# Altium PCB ESP32 with USB C V1.PcbDoc (part 3 of 3)
Units mil, origin at the board's own origin, x right, y up, seen from the top; angles counter-clockwise.
Board outline 2700 x 1000 mil, 4 copper layers (L1, L2, L3, L4), stack 61.583 mil thick; 64 components, 74 nets, 299 pads, 161 vias.
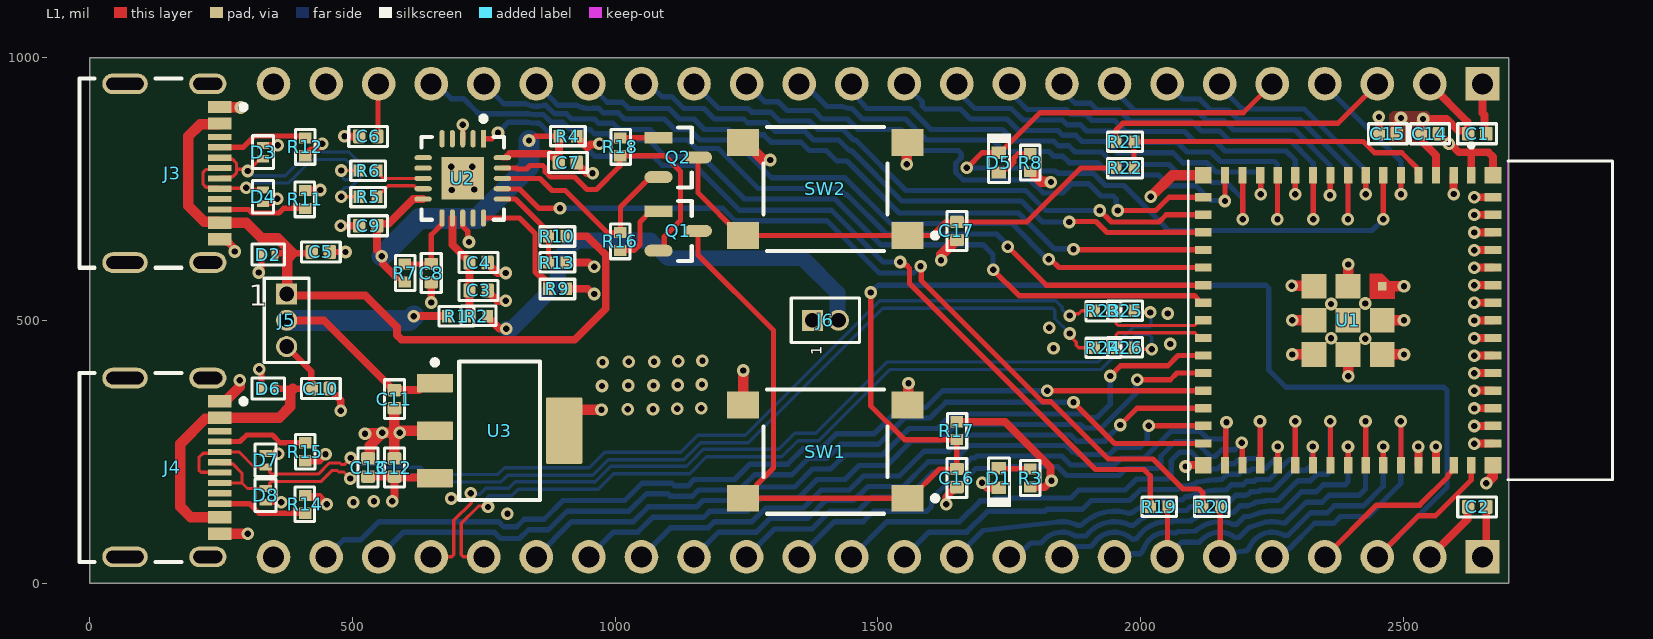
[diagram p0: L1 view]

## Via types
v1: diameter 24, hole 12, L1 to L4, 161 vias

## Nets (pads, with @x,y where several pads share a name; then routed paths per layer and width w, separated by ;. In a path a pad name is that pad's centre, name@x,y a point inside that pad or via, vN(x,y) a via of type N, cw(c..) or ccw(c..) an arc to the next point about the centre after c; other vN are vias at no path point) (continued)
CHIP_PU: (continued)
  L1 w10: Q1.3 1157.42,624.58 1301,481 1301,218.91 1269.02,186.93 1269.02,182.01 SW1.2@1248.43,161.42 ; SW1.2 SW1.2@1248.43,161.42 ; v1(1486,553) 1486,337.42 1550.43,272.99 R17.1 C16.2 1617.2,217.2 1561.42,161.42 SW1.1 SW1.2@1248.43,161.42 ; J2.3 2528.34,128.34 2560.66,128.34 2628.66,196.34 U1.45
  L4 w10: v1(1486,553) 1499.82,566.82 2237.67,566.82 2243.53,560.96 2243.53,405.47 2276.37,372.63 2576.57,372.63 2582.43,366.77 2582.43,182.43 J2.3
CON1_USB_N: D3.2 J3.A7 J3.B7 R5.1 | length 517
  L1 w6.03: J3.A7 250.53,772.97 272.14,772.97 279.29,780.12 279.29,789.76 ; J3.B7 250.53,806.56 272.14,806.56 279.29,799.4 279.29,789.76 ; D3.2 325.08,807.2 301.87,784 v1(301,784) 297.56,787.44 281.62,787.44 279.29,789.76 ; v1(479,735) R5.1
  L4 w6.03: v1(301,784) 304.53,784 313.52,775.01 372.28,775.01 417.34,820.08 493.53,820.08 514.08,799.53 514.08,770.47 496.59,752.99 485.78,752.99 482.25,749.45 482.25,738.25 v1(479,735)
CON1_USB_P: D4.2 J3.A6 J3.B6 R6.1 | length 497.7
  L1 w6.03: J3.A6 244.75,786.87 221.3,786.87 215.99,781.56 215.99,758.6 221.3,753.28 244.75,753.28 J3.B6 248.44,751.2 297.2,751.2 v1(298,752) 300.1,749.9 327.9,749.9 D4.2 ; v1(479,785) R6.1
  L4 w6.03: v1(298,752) 301.53,752 310.52,760.99 378.09,760.99 423.15,806.05 487.72,806.05 500.05,793.72 500.05,776.28 490.78,767.01 485.78,767.01 482.25,770.55 482.25,781.75 v1(479,785)
CON2_USB_N: D7.2 J4.A7 J4.B7 R23.1 | length 1978.5
  L1 w6.03: J4.A7 246.87,211 212,211 208,215 208,239 215.95,246.95 244.99,246.95 J4.B7 284.37,249.61 312.97,221 D7.2 338.84,221 342.71,217.13 342.71,211.05 346.25,207.51 434.87,207.51 455.87,228.51 476.39,228.51 479.39,225.51 484.72,225.51 497,237.8 v1(497,238)
  L1 w6.23: v1(1865,509) 1868.4,512.4 1881.59,512.4 1887.19,518 R23.1
  L4 w6.03: v1(497,238) 497,237.8 509.28,225.51 557.48,225.51 562.48,220.51 630.69,220.51 644.47,206.74 776.7,206.74 777,207.03
  L4 w6.23: 777,207.03 789.42,219.46 951,219.46 980.51,248.97 1124.76,248.97 1156.91,281.12 1247.3,281.12 1503.32,537.15 1838.35,537.15 1850.74,524.76 1850.74,519.76 1861.5,509 v1(1865,509)
CON2_USB_P: D8.2 J4.A6 J4.B6 R24.1 | length 1958.7
  L1 w6.03: J4.B6 290.01,190.55 ; J4.A6 250.53,227.03 272.14,227.03 290.01,209.15 290.01,190.55 ; v1(496,199) 496,199.2 483.72,211.49 473.58,211.49 470.58,214.49 461.68,214.49 440.68,193.49 346.25,193.49 342.71,189.95 342.71,183.87 338.84,180 D8.2 300.56,180 290.01,190.55
  L1 w6.23: v1(1865,475) 1865,470.19 1877.09,458.1 1877.09,452.5 1881.59,448 R24.1
  L4 w6.03: v1(496,199) 496,199.2 508.28,211.49 551.67,211.49 556.67,206.49 624.88,206.49 638.66,192.7 782.51,192.7 786.78,196.97 787.06,196.97
  L4 w6.23: 787.06,196.97 795.32,205.23 956.89,205.23 986.41,234.74 1130.65,234.74 1162.8,266.89 1253.19,266.89 1509.22,522.92 1832.46,522.92 1836.51,518.87 1836.51,503.49 v1(1865,475)
CON_ESP_USB_N: J2.21 R25.1 | length 1660.7
  L1 w6.23: J2.21 689.24,50 692.89,53.65 692.89,119.45 726.74,153.3 726.74,169.26 v1(725,171) ; R25.1@1987.01,515 v1(2018,515)
  L4 w6.23: v1(725,171) 726.74,169.26 742.7,169.26 754.01,180.58 797.58,180.58 810,193 962,193 991.51,222.51 1135.72,222.51 1167.87,254.66 1311.27,254.66 1341.95,285.34 1381.69,285.34 1517.19,420.85 1919.05,420.85 1985.32,487.11 2015.85,487.11 2019.5,490.76 2019.5,513.5 v1(2018,515)
CON_ESP_USB_P: J2.20 R26.1 | length 1641.4
  L1 w6.23: J2.20 710.76,50 707.11,53.65 707.11,113.55 740.3,146.74 756.26,146.74 v1(758,145) ; R26.1 1990.01,445 v1(2021,445)
  L4 w6.23: v1(758,145) 756.26,146.74 756.26,162.7 759.91,166.34 803.47,166.34 815.89,178.77 967.89,178.77 997.41,208.28 1141.61,208.28 1173.76,240.43 1317.16,240.43 1347.85,271.11 1387.58,271.11 1523.09,406.62 1924.94,406.62 1991.21,472.89 2015.85,472.89 2021,467.74 v1(2021,445)
CON_GPIO0: J1.3 R21.1 | length 556.4
  L1 w10: R21.1 1952,840.99 1952,861.14 1965.86,875 2375,875 J1.3
DTR_FTDI: Q2.2 R16.1 U2.18 | length 412
  L1 w10: U2.18 857.1,770 880.1,747 905,747 984.99,667.01 R16.1 1010,715.47 1067.12,772.6 Q2.2
ESP_USB_N: R23.2 R25.2 U1.23 | length 199.2
  L1 w6.03: R23.2 1952.99,511.02 1952.99,493.82 1956.52,490.28 2102.55,490.28 2106.09,493.82 2106.09,495.14 2110.94,500 U1.23
ESP_USB_P: R26.2 U1.24 | length 196.8
  L1 w6.03: R26.2 1952.99,472.72 1956.52,476.25 2102.55,476.25 2106.09,472.72 2106.09,471.39 2110.94,466.54 U1.24
FTDI_USB_N: R5.2 U2.9 | length 99.3
  L1 w6.03: R5.2 547.01,736.18 554.62,743.8 555.8,743.8 567.98,755.97 598,755.97 617.54,755.97 623.19,750.32 U2.9
FTDI_USB_P: R6.2 U2.8 | length 96
  L1 w6.03: R6.2 554.62,777.39 554.62,773.53 558.16,770 598,770 U2.8
GND: C1.1 C2.1 C3.1 C4.1 C5.1 C6.1 C7.1 C8.1 C9.1 C10.1 C11.1 C12.1 C13.1 C14.1 C15.1 C16.1 C17.1 D1.1 D2.1 D3.1 D4.1 D6.1 D7.1 D8.1 J1.1 J1.23 J2.2 J2.24 J3.A1B12 J3.B1A12 J3.S1 J3.S2 J3.S3 J3.S4 J4.A1B12 J4.B1A12 J4.S1 J4.S2 J4.S3 J4.S4 R9.2 R11.1 R12.1 R13.1 R14.1 R15.1 SW1.3 SW1.4 SW2.3 SW2.4 U1.1 U1.2 U1.42 U1.43 U1.46 U1.47 U1.48 U1.49 U1.50 U1.51 U1.52 U1.53 U1.54 U1.55 U1.56 U1.57 U1.58 U1.59 U1.60 U1.61 U1.62 U1.63 U1.64 U1.65 U1.66 U1.67 U1.68 U1.69 U1.70 U1.71 U1.72 U1.73 U2.3 U2.13 U2.21 U3.2 U3.4 | length 3413.7
  L1 w10: U2.13 710.23,694.36 710.23,678.56 719.32,669.47 719.32,651.68 v1(722,649) ; C4.1@757,609 757,609.8 C4.1
  L1 w10.01: U2.3 v1(710,872)
  L1 w12: v1(322,591) 327.2,596.2 D2.1 ; v1(323,407) 327.2,402.8 D6.1 ; D4.1 330.89,723.09 345.85,723.09 353.75,731 v1(357,731) ; D3.1 v1(358.2,832.8) ; D8.1 335.2,154.2 364.8,154.2 v1(365,154) ; D7.1 358.41,246.59 v1(359,246) ; C5.1 v1(487,630)
  L1 w15: J3.B1A12 258.46,653.94 276,636.4 v1(276,631) ; R14.1 413.13,163.88 437.12,163.88 v1(451,150) ; R15.1 436.99,232.99 v1(449,245) ; R11.1 410.5,747.5 438.5,747.5 v1(439,748) ; R12.1 411.18,812.99 421.07,822.88 429.88,822.88 v1(443,836) ; C10.1 457.2,368.62 478,347.83 v1(478,328) ; v1(478,680) C9.1 ; v1(485,850) C6.1 ; v1(650,534) C8.1 ; C4.1@757,609 757,608.83 775.83,590 v1(792,590) ; C3.1 757.2,555.62 775.83,537 v1(792,537) ; R9.2 947.56,560 957.56,550 v1(960,550) ; R13.1 949.56,610 957.56,602 v1(960,602) ; C7.1 928,799.2 928,797.83 945.83,780 v1(957,780) ; v1(1630,150) 1630,164.17 1648.62,182.8 C16.1 ; v1(1698,191) 1708,181 1729.7,181 D1.1 ; v1(2085,222) 2087.41,224.41 U1.64 ; C15.1 2452.9,855.1 2452.9,886.9 v1(2453,887) ; U1.42 v1@2528.27,259.87 ; J2.2 2621.35,121.35 2621.35,143.56 C2.1 ; U1.43 v1@2561.73,259.87 ; C14.1 2567.2,853.62 2571.52,849.31 2572.89,849.31 v1(2586.2,836) ; v1@2587.48,834.72 v1(2586.2,836) ; v1@2595.2,740.13 U1.2 ; U1.1 2628.66,815.41 2633.03,819.79 ; v1@2634.53,265.75 U1.46 ; v1@2634.53,299.21 U1.47 ; v1@2634.53,332.68 U1.48 ; v1@2634.53,366.14 U1.49 ; v1@2634.53,399.61 U1.50 ; v1@2634.53,433.07 U1.51 ; v1@2634.53,466.54 U1.52 ; v1@2634.53,500 U1.53 ; v1@2634.53,533.46 U1.54 ; v1@2634.53,566.93 U1.55 ; v1@2634.53,600.39 U1.56 ; v1@2634.53,633.86 U1.57 ; v1@2634.53,667.32 U1.58 ; v1@2634.53,700.79 U1.59 ; v1@2634.53,734.25 U1.60 ; J1.1 2650,894.54 2653.85,890.69 2653.85,858.35 C1.1 ; v1(2657,190) v1@2657,191 ; U1.62 2670,811 2661.21,819.79 2633.03,819.79 ; v1(2586.2,836) 2588.64,836 2604.85,819.79 2633.03,819.79
  L1 w20: J4.B1A12 299.15,94.09 299.25,94 v1(301,94) ; J4.A1B12 258.46,346.06 286,373.6 v1(286,386) ; J3.A1B12 248.54,905 v1(288,905) ; v1(524,284) 524.77,284.77 554.68,284.77 555.92,286 v1(557,286) ; C13.1 531.38,237.2 533.19,239.02 533.19,261.11 557,284.92 v1(557,286) ; C12.1 580,274.92 590,284.92 v1(590,286) ; C11.1 580,297.08 590,287.08 v1(590,286) ; U3.2 595.08,290 591.08,286 v1(590,286) ; U3.4 903.03,305.55 927.48,330 v1(974,330) ; SW1.4 v1(1243.5,404.53) ; SW2.4 1248.43,838.58 1282.01,805 v1(1295,805) ; v1(1555,797) 1555,837.09 SW2.3 ; SW1.3 1558,340.09 v1(1558,380) ; v1(1620,614) 1620.77,614.77 1620.77,624.94 1646.81,650.98 1648.19,650.98 C17.1 ; v1(2019,735) 2059.59,775.59 U1.63 ; v1(2287,566) 2328.41,566 U1.71 ; v1(2288.04,435.04) U1.73 ; v1(2288.04,500) U1.72 ; v1(2394.41,393.63) U1.70 ; U1.69 v1(2394.41,606.37) ; U1.68 v1(2500.78,435.04) ; U1.67 v1(2500.78,500) ; U1.66 v1(2500.78,564.96) ; v1(2657,190) 2669.21,202.21 U1.65@2669.21,223.62 ; v1(557,286) v1(590,286)
  other v1: 795,132 688,161 2527.97,259.79 2561.43,259.79 2634.62,265.45 2634.62,298.91 1024,331 1072,331 1118,332 2634.62,332.38 1164,333 2634.62,365.84 975,375 1025,376 1073,376 1119,377 1165,378 2634.62,399.3 976,420 1026,421 1074,421 1120,422 1166,423 2634.62,432.77 1834,447 2056,455 2427,465 2362,466 2634.62,466.23 1826,486 2634.62,499.7 2051,513 2362,531 2427,532 2634.62,533.16 2634.62,566.63 2634.62,600.09 2634.62,633.56 2634.62,667.02 2634.62,700.49 2634.62,733.95 2595.5,740.21 689,748 732,749 688,792 728,792
GPIO0: R21.2 R22.2 U1.4 | length 624.6
  L1 w10: R22.2 R21.2 2423.31,840 2444.54,818.78 2496.45,818.78 2525.39,789.84 2525.39,778.46 U1.4
GPIO1: J1.4 U1.5 | length 305.8
  L1 w10: U1.5@2494.8,775.66 U1.5 2494.8,740.2 v1(2495,740)
  L4 w10: J1.4 2350,947 2495,802 v1(2495,740)
GPIO2: D5.1 J1.5 U1.6 | length 1580.8
  L1 w10: v1(1669,790) 1697.7,818.7 D5.1 1731.97,818.7 1808.27,895 2195,895 J1.5 ; v1@2461.34,692.2 U1.6
  L4 w10: v1(1669,790) 1800.44,790 1806.44,784 1837.7,784 1841.7,780 1909.01,780 1932.65,756.36 1967.94,756.36 2053.23,671.07 2385.23,671.07 2385.3,671 2440.13,671 v1(2461.13,692)
GPIO3: J1.6 U1.7 | length 429.6
  L1 w10: v1(2427.87,740.13) U1.7
  L4 w10: J1.6 2150,945 2193,902 2311,902 2427.87,785.13 v1(2427.87,740.13)
GPIO4: J1.7 U1.8 | length 597.9
  L1 w10: v1(2394,692) 2394.2,692.2 U1.8@2394.2,775.39 ; U1.8@2394.2,775.59 U1.8@2394.2,775.39 ; U1.8 U1.8@2394.2,775.39
  L4 w10: J1.7 2050,941 2059.18,941 2079.18,921 2112,921 2133,900 2166.72,900 2184.72,882 2302.72,882 2394,790.72 v1(2394,692)
GPIO5: J1.8 U1.9 | length 576.6
  L1 w10: v1(2360,738) 2360.47,738.47 U1.9@2360.47,774.94 ; U1.9@2360.47,775.12 U1.9
  L4 w10: J1.8 1950,937 1988,899 2105.72,899 2124.72,880 2158.43,880 2176.43,862 2293,862 2360,795 v1(2360,738)
GPIO6: J1.9 U1.10 | length 737.5
  L1 w10: v1(2327.89,692.2) U1.10@2327.89,775.59
  L4 w10: J1.9 1850,938 1875,913 1904,913 1917,900 1958.72,900 1979.72,879 2096,879 2115,860 2150.15,860 2168.15,842 2284.72,842 2327.89,798.83 v1(2327.89,692.2)
GPIO7: J1.10 U1.11 | length 712.9
  L1 w10: v1(2294,740.13) U1.11
  L4 w10: J1.10 1750,935.39 1778,907.39 1778,906.86 1783.86,901 1858.72,901 1867.72,892 1895,892 1907,880 1950.43,880 1971.43,859 2083,859 2102,840 2141.86,840 2159.86,822 2276.43,822 2294,804.43 v1(2294,740.13)
GPIO8: J1.11 U1.12 | length 868.9
  L1 w10: v1(2259.89,692.2) U1.12@2259.89,775.59
  L4 w10: J1.11 1650,937 1684,903 1753.57,903 1775.57,881 1850.43,881 1859.43,872 1885,872 1897,860 1942.15,860 1963.15,839 2069,839 2088,820 2133.58,820 2151.58,802 2254.28,802 2260.14,796.14 2260.14,692.46 v1(2259.89,692.2)
GPIO9: J1.12 U1.13 | length 826.2
  L1 w10: v1(2228,740.13) U1.13@2228,775.59
  L4 w10: J1.12 1584.14,915.86 1584.14,907.86 1590,902 1656.72,902 1675.72,883 1745.29,883 1767.29,861 1842.15,861 1851.15,852 1876,852 1888,840 1933.86,840 1954.86,819 2060.72,819 2079.72,800 2125.29,800 2143.29,782 2222.14,782 2228,776.14 v1(2228,740.13)
GPIO10: J1.13 U1.14 | length 967.6
  L1 w10: v1(2193.89,692.2) U1.14@2193.89,775.59
  L4 w10: J1.13 1450,935.39 1464.73,920.65 1464.73,918.27 1472.93,910.07 1472.93,908.86 1478.79,903 1560.72,903 1600.72,863 1737.01,863 1759.01,841 1833.86,841 1842.86,832 1863,832 1875,820 1925.58,820 1949.22,796.36 2053.64,796.36 2071,779 2118.01,779 2135.01,762 2163.18,762 2193.89,731.3 v1(2193.89,692.2)
GPIO11: J1.14 U1.15 | length 949.9
  L1 w10: v1(2160,727) 2160.08,727.08 2160.08,775.51 U1.15
  L4 w10: J1.14 1360,950 1400.07,909.93 1403,907 1431.03,907 ccw(c1450,950) 1450.5,903 1470.5,883 1552.43,883 1592.43,843 1718,843 1740,821 1825.58,821 1834.58,812 1852,812 1864,800 1917.29,800 1940.94,776.36 2034,776.36 2054.36,756 2105,756 2133,728 2159,728 v1(2160,727)
GPIO12: J1.15 U1.16 | length 1040.4
  L1 w10: v1(1956,709) 2028.36,709 2053.61,734.25 U1.16
  L4 w10: J1.15 1284,916 1310,916 1327,899 1378,899 1394,883 1442,883 1462,863 1544.15,863 1584.15,823 1652.3,823 1658.16,817.14 1658.16,808.86 1648,798.7 1648,781.3 1662.3,767 1789.5,767 1814.5,742 1851.51,742 1869.51,760 1900.73,760 1924.37,736.36 1947.46,736.36 1953.32,730.5 1953.32,711.68 v1(1956,709)
GPIO13: J1.16 U1.17 | length 1083.5
  L1 w10: v1(1922,709) 1944,687 2034.64,687 2048.43,700.79 U1.17
  L4 w10: J1.16 1197,903 1253,903 1260,896 1296,896 1313,879 1369.72,879 1385.72,863 1433.72,863 1453.72,843 1457.57,843 1553.57,747 1781.22,747 1819.22,709 v1(1922,709)
GPIO14: J1.17 U1.18 | length 1187
  L1 w10: v1(1864,687) 1865,688 1914.72,688 1935.72,667 2042.92,667 2043.25,667.32 U1.18
  L4 w10: J1.17 1064.61,950 1089.35,925.27 1108.27,925.27 1130.53,903 1168.72,903 1188.72,883 1244.72,883 1251.72,876 1287.72,876 1304.72,859 1361.43,859 1377.43,843 1425.43,843 1445.43,823 1449.28,823 1545.28,727 1772.93,727 1812.93,687 v1(1864,687)
GPIO15: J1.18 U1.19 | length 1299.8
  L1 w10: v1(1872,635) 1872.57,634.43 2118.25,634.43 U1.19
  L4 w10: J1.18 985,915 1014,915 1026,903 1102.25,903 1122.25,883 1149.62,883 1169.62,863 1216.72,863 1223.72,856 1271,856 1274,853 1282.43,853 1296.43,839 1353.15,839 1369.15,823 1401.43,823 1421.43,803 1441,803 1540,704 1767.65,704 1835.65,636 1871,636 v1(1872,635)
GPIO16: J1.19 U1.20 | length 1412.5
  L1 w10: v1(1825,616) 1828.79,616 1844.39,600.39 U1.20
  L4 w10: J1.19 888.07,911.93 891,909 927.02,909 ccw(c950,950) 957.69,903.63 968.08,903.63 976.72,895 1005.72,895 1017.72,883 1093.96,883 1113.96,863 1141.34,863 1161.34,843 1177.09,843 1214.09,843 1217.09,840 1229,840 1298,771 1437.28,771 1524.28,684 1754.72,684 1822.72,616 v1(1825,616)
GPIO17: J1.20 U1.21 | length 1528.8
  L1 w10: v1(1747,640) 1820.07,566.93 U1.21
  L4 w10: J1.20 785.14,914.86 788.07,911.93 830.01,911.93 ccw(c850,950) 858.19,907.79 864.23,908.96 868.41,908.96 884.37,893 907,893 917,883 960.43,883 968.43,875 996,875 1008,863 1066.76,863 1086.76,843 1138.71,843 1154.71,827 1196.15,827 1272.15,751 1426.28,751 1438.28,739 1441,739 1516,664 1725.75,664 1747,642.75 v1(1747,640)
GPIO18: J1.21 U1.22 | length 1660.7
  L1 w10: v1(1719,596) 1768.07,546.93 2102.21,546.93 2108.07,541.07 2108.07,536.34 2110.94,533.46 U1.22
  L4 w10: J1.21 660,950 688.23,921.77 711.77,921.77 737.6,895.93 740.53,893 834.77,893 ccw(c850,950) 858.33,891.59 859.01,891.59 863.15,891.59 877.75,877 900.37,877 914.37,863 952.15,863 960.15,855 987,855 999,843 1064.13,843 1096.13,811 1166,811 1246,731 1418,731 1505,644 1700,644 1719,625 v1(1719,596)
GPIO21: J2.19 U1.25 | length 1464.4
  L1 w10: v1(1942,394) 1961.54,413.54 2051.54,413.54 2071.07,433.07 U1.25
  L4 w10: J2.19 917,117 1034.72,117 1062.86,145.14 1155,145.14 1166.86,157 1243.86,157 1269.86,183 1341.58,183 1375.58,217 1410,217 1437,244 1508.72,244 1558.86,294.14 1612.86,294.14 1640.72,322 1893.75,322 1900.5,315.25 1916.75,315.25 1942,340.5 v1(1942,394)
GPIO26: J2.18 U1.26 | length 1333.3
  L1 w10: v1(1993,387) 2056,387 2068.61,399.61 U1.26
  L4 w10: J2.18 997,97 1043,97 1071.14,125.14 1168.57,125.14 1180.43,137 1252.15,137 1278.15,163 1349.86,163 1383.86,197 1437.15,197 1464.15,224 1517,224 1564,271 1618,271 1649,302 1885.46,302 1892.39,295.07 1924.86,295.07 1990.32,360.53 1990.32,384.32 v1(1993,387)
GPIO33: J2.17 U1.28 | length 1197.3
  L1 w10: v1(1960.79,300.79) 1992.68,332.68 U1.28
  L4 w10: J2.17 1105.14,105.14 1176.86,105.14 1188.72,117 1260.43,117 1286.43,143 1358.15,143 1392.15,177 1445.43,177 1472.43,204 1540.43,204 1587.43,251 1634.15,251 1665.15,282 1866.04,282 1878.04,270 1932.54,270 1933.04,270.5 1933.04,273.04 v1(1960.79,300.79)
GPIO34: J2.16 U1.29 | length 1100.6
  L1 w10: v1(2015,299.21) U1.29
  L4 w10: J2.16 1197,97 1268.72,97 1294.72,123 1366.43,123 1400.43,157 1453.72,157 1480.72,184 1548.72,184 1595.72,231 1642.43,231 1673.43,262 1857.75,262 1869.75,250 1875,250 1880.36,244.64 1940,244.64 1953.63,258.28 1998.24,258.28 2012.32,272.36 2012.32,296.53 v1(2015,299.21)
GPIO35: J2.15 U1.31 | length 1143.9
  L1 w10: U1.31 2161.58,225.83 2161.58,304.58 v1(2163,306)
  L4 w10: J2.15 1303,103 1374.72,103 1408.72,137 1462,137 1489,164 1557,164 1604,211 1650.72,211 1677.72,238 1684,238 1688,242 1849.47,242 1866.83,224.64 1950.07,224.64 1963.71,238.28 2006.52,238.28 2057.25,289 2112.75,289 2127.75,274 2157.14,274 2163,279.86 v1(2163,306)
GPIO36: J2.14 U1.32 | length 1034.5
  L1 w10: v1(2192,267) 2192.81,266.19 2192.81,225.22 U1.32
  L4 w10: J2.14 1417,117 1472,117 1492,137 1593,137 1602,146 1602,160.18 1632.82,191 1659,191 1686,218 1709.18,218 1712.95,214.23 1721.23,214.23 1729,222 1841.18,222 1858.54,204.64 1958.36,204.64 1971.99,218.28 2032.14,218.28 2038,224.13 2038,241.47 2065.53,269 2104.47,269 2113.08,260.39 2132.74,240.73 2141.02,240.73 2154.11,253.81 2178.81,253.81 v1(2192,267)
GPIO37: J2.13 U1.33 | length 1055.1
  L1 w10: v1@2227,308 v1@2227.09,307.91 ; U1.33 v1@2227.09,307.8
  L4 w10: J2.13 1517,117 1655.22,117 1694.78,156.55 1717,156.55 1722.45,162 1867,162 1882,177 1970.36,177 1991.64,198.28 2052.14,198.28 2058,204.13 2058,233.18 2073.82,249 2096.18,249 2112,233.18 2112,222.49 2117.86,216.63 2134.44,216.63 2134.81,217 2145.58,217 2155.58,227 2177.67,227 2184.48,233.81 2199.49,233.81 2202.68,237 2220.93,237 2223.86,239.93 2226.78,242.86 v1(2226.78,307.71)
GPIO38: J2.12 U1.34 | length 840.4
  L1 w10: U1.34 v1@2260.55,259.87
  L4 w10: J2.12 1597,97 1668.72,97 1708.27,136.55 1817,136.55 1821.05,140.6 1889.3,140.6 1905.7,157 1978.64,157 1999.92,178.28 2070.44,178.28 2076.53,184.37 2087.03,184.37 2104.57,189.82 2107.1,192.35 2129.14,195.51 cw(c2150,50) 2142.92,196.83 ccw(c2142.39,206.82) 2144.17,196.98 2148.38,196.99 cw(c2150,50) 2150.3,197 2153.86,197 2163.86,207 2185.96,207 2192.77,213.81 2207.77,213.81 2210.96,217 2236.01,217 2260.25,241.24 v1(2260.25,259.79)
GPIO39: J2.11 U1.35 | length 860.6
  L1 w10: U1.35 v1@2294.02,307.8
  L4 w10: J2.11 1700,100 1842.26,116.55 cw(c1850,50) 1878.42,110.67 ccw(c1882.6,119.76) 1889.52,112.54 cw(c1950,50) 1975.65,133.13 cw(c1950,50) 1975.71,133.11 ccw(c1978.6,142.69) 1984.66,134.74 cw(c2050,50) 2037.12,156.22 ccw(c2035.86,166.14) 2041.67,158 2068.88,158 2078.73,158.28 2084.82,164.37 2090.07,164.37 2112.32,171.28 cw(c2150,50) 2112.45,171.32 2115.22,172.18 ccw(c2113.34,182) 2115.96,172.35 cw(c2150,50) 2152.46,176.98 ccw(c2152.55,186.98) 2152.55,176.98 2156.69,176.98 2162.12,176.98 2172.15,187 2194.24,187 2201.05,193.81 2215.16,193.81 2216.19,193.94 2219.25,197 2244.29,197 2282.29,235 2287.86,235 2293.71,240.86 v1(2293.71,307.71)
GPIO40: J2.10 U1.36 | length 713.5
  L1 w10: U1.36 v1@2327.48,259.87
  L4 w10: J2.10 1764,50 1790.23,76.23 1806,76.23 1809.77,76.23 1812.6,78.72 ccw(c1806,86.23) 1813.71,79.86 cw(c1850,50) 1875.29,89.61 1895.26,89.61 1898.19,92.54 ccw(c1891.11,99.61) 1898.22,92.58 1899.69,94.25 cw(c1950,50) 1978.43,110.67 ccw(c1982.6,119.76) 1989.5,112.52 cw(c2050,50) 2048.9,136.99 ; 2048.94,136.99 ccw(c2048.77,146.99) 2053.15,138 2069.16,138 2087.24,138.51 2093.1,144.37 2118.25,152.18 cw(c2150,50) 2159.94,156.54 2160.39,156.54 2164.54,156.54 2169.97,156.54 2180.43,167 2199.33,167 2204.11,168.58 2209.34,173.81 2216.39,173.81 2225.47,174.93 2227.53,177 2252.58,177 2290.58,215 2314.72,215 2325,225.28 2325,257.61 v1(2327.18,259.79)
GPIO41: J2.9 U1.37 | length 756.9
  L1 w10: U1.37 v1@2360.94,307.8
  L4 w10: J2.9 1869.61,69.61 1905.44,69.61 1908.37,72.54 ccw(c1901.3,79.61) 1908.4,72.58 1911.62,77.13 cw(c1950,50) 1980.22,86 ccw(c1986.6,93.7) 1994.81,87.98 cw(c2050,50) 2055.64,116.76 2056.05,116.76 2056.61,116.76 2060.19,116.76 2061.43,118 2069.44,118 2095.76,118.74 2099.97,122.95 ccw(c2099.71,132.95) 2104.85,124.37 cw(c2150,50) 2170.85,134.46 2172.04,134.46 2176.18,134.46 2188.72,147 2202.56,147 2214.9,151.09 2217.62,153.81 2234.75,155.93 ccw(c2232.65,165.71) 2237.57,157 2240.72,157 2260.86,157 2298.86,195 2323,195 2335,207 2354.79,207 2360.64,212.86 v1(2360.64,307.71)
GPIO42: J2.8 U1.38 | length 605.2
  L1 w10: U1.38 v1@2394.41,259.87
  L4 w10: J2.8 1956,56 1999.43,56 2002.36,58.93 ccw(c1995.29,66) 2002.4,58.96 2007.29,69.61 cw(c2050,50) 2061.84,95.48 2063.06,95.48 ; 2063.08,95.48 2067.2,95.48 2069.72,98 2104.27,98.97 2107.15,101.85 ccw(c2102.85,110.88) 2108.95,102.95 cw(c2150,50) 2175.77,111.84 2177.7,111.84 2181.84,111.84 2197,127 2205.79,127 2222.61,132.58 ; 2222.65,132.59 2225.69,133.6 ccw(c2224.02,143.46) 2226.66,133.81 cw(c2250,50) 2256.17,136.78 ccw(c2256.82,146.76) 2257.42,136.78 2260.86,136.98 cw(c2261.46,127) 2261.46,137 2269.15,137 2306.15,174 2334,174 2347,187 2388.25,187 2394.11,192.86 v1(2394.11,259.79)
GPIO45: J2.5 U1.41 | length 503.9
  L1 w10: U1.41 v1@2494.8,307.8
  L4 w10: J2.5 2264.61,50 2279.35,64.73 2281.73,64.73 2331,114 2367,114 2380,127 2432,127 2494.5,189.5 v1(2494.5,307.71)
GPIO46: J2.4 U1.44 | length 324.1
  L1 w10: J2.4 2448.34,148.34 2530.49,148.34 2584.61,202.45 2584.61,205.94 2595.2,216.54 U1.44
GPIO47: J2.23 U1.27 | length 1811.9
  L1 w10: v1(1822,366) 1822.14,366.14 1930.22,366.14 1930.36,366 2046.12,366 2046.26,366.14 U1.27
  L4 w10: J2.23 451,50 483.73,82.73 516.27,82.73 550.53,117 777.75,117 787.42,107.33 812.58,107.33 826.89,121.64 865.07,121.64 900.43,157 1018.15,157 1051.15,190 1108.28,190 1113.14,185.14 1138.43,185.14 1150.29,197 1227.29,197 1256.61,226.32 1328.33,226.32 1359.01,257 1393.43,257 1420.43,284 1492.15,284 1542.29,334.14 1590.86,334.14 1622.72,366 v1(1822,366)
GPIO48: J2.22 U1.30 | length 1737.2
  L1 w10: v1(1872,344) 1950.25,265.75 U1.30
  L4 w10: J2.22 597,97 769.47,97 781.73,84.73 818.27,84.73 835.17,101.64 873.36,101.64 908.72,137 1026.43,137 1059.43,170 1100,170 1104.86,165.14 1146.72,165.14 1158.57,177 1235.58,177 1264.9,206.32 1336.61,206.32 1367.29,237 1401.72,237 1428.72,264 1500.43,264 1550.57,314.14 1599.14,314.14 1629,344 v1(1872,344)
"Net R11_2": J3.B5 R11.2 | length 168.7
  L1 w10: J3.B5 302.47,711.02 309.18,704.31 360.36,704.31 369.03,712.99 R11.2
NetC8_2: C8.2 R7.2 U2.11 | length 146
  L1 w10: R7.2 600.1,607.11 649.9,607.11 C8.2 650,662.65 670.63,683.28 U2.11
NetD1_2: D1.2 R3.1 | length 60.7
  L1 w10: D1.2 1730.85,217.85 1789.15,217.85 R3.1
NetD5_2: D5.2 R8.1 | length 79.5
  L1 w10: D5.2 1736.81,788.11 1746.21,788.11 1758.78,800.68 1758.78,808.78 1767.01,817.01 R8.1
NetJ3_A5: J3.A5 R12.2 | length 172.8
  L1 w10: J3.A5 292.08,829.13 313.63,850.69 406.32,850.69 R12.2
NetJ4_A5: J4.A5 R15.2 | length 173.8
  L1 w10: J4.A5 286.29,269.29 299,282 347.91,282 362.91,267.01 R15.2
NetJ4_B5: J4.B5 R14.2 | length 169.9
  L1 w10: J4.B5 303.97,151.18 322.16,132.99 R14.2
NetQ1_1: Q1.1 R16.2 | length 128.8
  L1 w10: R16.2 1036.03,632.99 1047,643.96 1047,687.28 1067.12,707.4 Q1.1
NetQ2_1: Q2.1 R18.2 | length 72.7
  L1 w10: R18.2 1010.2,847.2 1082.38,847.2 Q2.1
NetR9_1: R9.1 U2.15 | length 229.2
  L1 w10: U2.15 818.13,694.59 820,692.72 840,672.72 847.36,665.35 847.36,591.98 856.15,583.19 861.5,583.19 867.36,577.33 867.36,565.63 R9.1
RTS_FTDI: Q1.2 R18.1 U2.19 | length 585.8
  L1 w10: U2.19 811.65,789.68 813.46,787.87 831.28,787.87 837.93,794.52 862.11,794.52 866.98,789.64 866.98,782.74 876.92,772.81 922.61,772.81 946.42,749 964.32,749 1008.54,793.22 1008.54,811.54 R18.1 1094.78,812.99 1124.29,783.48 1124.29,689.93 1093.23,658.86 1093.23,638.38 1087.44,632.6 Q1.2
RXD_FTDI: R19.2 U2.1 | length 1635.9
  L1 w10: U2.1 765.41,845.41 v1(777,857) ; v1(1542,611) 1545.79,611 1551.83,604.96 1554.14,604.96 1560,599.1 1560,570.02 1914.02,216 1929.72,216 2006.14,216 2017.99,204.15 R19.2
  L4 w10: v1(777,857) 797,877 832.79,877 ccw(c850,950) 851.28,875.01 851.75,875.02 ; 851.8,875.02 855.94,875.02 858.87,872.09 883.96,847 926.96,847 961.96,812 1072.5,812 1089.5,795 1151,795 1236.64,709.36 1411.36,709.36 1509.72,611 v1(1542,611)
TXD_FTDI: R20.2 U2.17 | length 1624.8
  L1 w10: U2.17 796.72,750.32 797.4,749.63 818.24,749.63 854.87,713 v1(895,713) ; v1(1581,603) 1582.3,601.7 1582.3,576 1813.3,345 1829,345 1938,236 2023.2,236 2079.99,179.22 2110.59,179.22 2117.99,171.81 R20.2
  L4 w10: v1(895,713) 1204.72,713 1228.36,689.36 1403.07,689.36 1502.43,590 1568,590 v1(1581,603)
U0RXD: J2.6 R20.1 U1.40 | length 575.6
  L1 w10: J2.6 2151,51 2151,144 R20.1 ; U1.40 v1@2461.34,259.87
  L4 w10: J2.6 2156.23,56.23 2201.64,61.51 2204.1,63.97 ccw(c2197.03,71.04) 2204.13,64.01 2208.68,72.39 cw(c2250,50) 2273.05,90.96 2275.53,90.96 2279.68,90.96 2322.72,134 2355,134 2368,147 2423.72,147 2461.04,184.32 v1(2461.04,259.79)
U0TXD: J2.7 R19.1 U1.39 | length 741.9
  L1 w10: J2.7 2051,51 2051,144 R19.1 ; U1.39 v1@2427.87,307.8
  L4 w10: J2.7 2078,78 2111.66,78 2114.59,80.93 ; v1(2427.57,307.71) 2427.57,179.14 2415.43,167 2358,167 2345,154 2314.43,154 2274.65,114.22 2270.51,114.22 2269.1,114.22 ccw(c2250,50) 2228.92,113.6 2206,106 2186.75,86.75 2182.61,86.75 2179.3,86.75 ccw(c2150,50) 2115.44,81.85 2114.62,80.96 ; 2114.59,80.93 ccw(c2107.51,88) 2114.62,80.96
VBUS_SENSE: R10.1 R13.2 U2.16 | length 171.5
  L1 w10: U2.16 810.37,730.63 820,721 867.36,673.64 867.36,665.63 R10.1 R13.2
pads on no net: J1.24 J3.A8 J3.B8 J4.A8 J4.B8 R24.2 U2.2 U2.4 U2.5 U2.6 U2.7 U2.14

## Polygon pours and split planes (outlines as drawn)
+3V3 on L1 "+3V3_L01_P001" (solid, pour order 1): 2473,892 2473,840 2550,840 2550,894 2546,898 2479,898
GND on L3 (split plane): 2679.9,20.1 20.1,20.1 20.1,979.9 2679.9,979.9

## Text inside footprints (layer, text, board x,y; h text height)
J1: Bottom Overlay "1" at 2633,878 h10 r270
J2: Bottom Overlay "1" at 2628,-38 h40 r270
J5: Top Overlay "1" at 303,528 h40
J6: Top Overlay "1" at 1393,434 h20 r90